# EAGLE board negativecircuit (EAGLE 6.4)
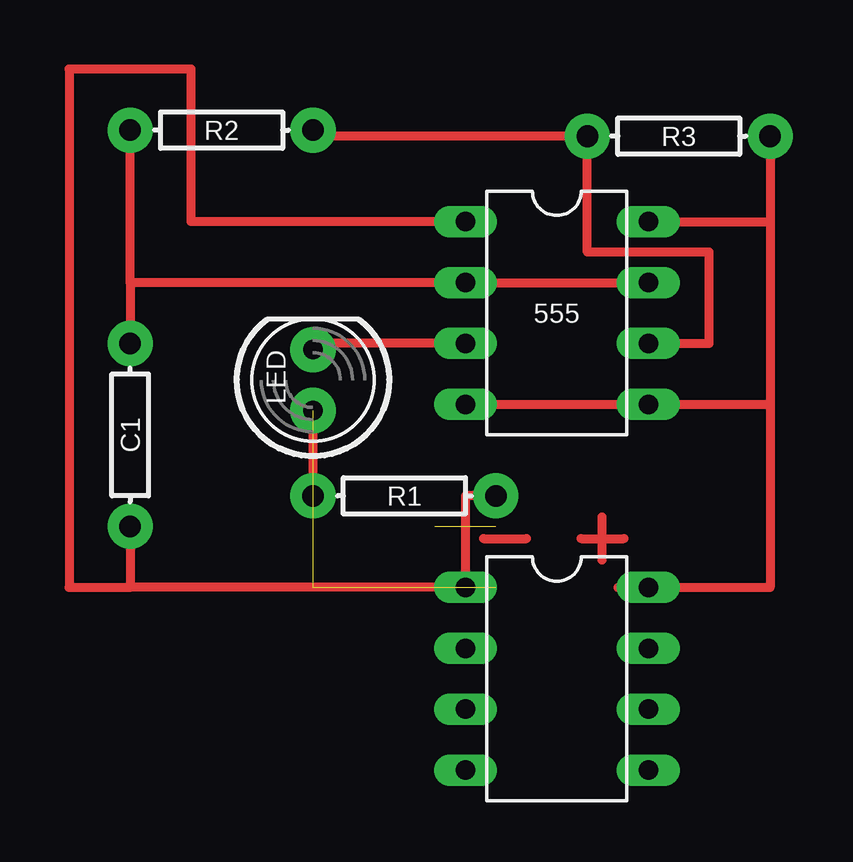
[diagram p0: board, top side]

No outline drawn. Coordinates in mm, seen from the top.
Copper layers (1*16): Top 0.035mm / dielectric 1.5mm / Bottom 0.035mm
Design rules "default": minimum track width 10mil, minimum drill 0.6mm, track to track 8mil, track to pad 8mil, pad to pad 8mil, via to via 8mil, smd to smd 8mil, copper to edge 40mil, drill to drill 8mil, minimum pad ring 10mil, minimum via ring 8mil, stop-mask expansion 4mil, vias tented up to drill 0mil, thermal gap 10mil

## Footprints (pad centres in the part's own frame; a part is rotated, then mirrored left to right if it is on the bottom)
DIL08 = drill 0.813 long: 1 -3.81,-3.81; 2 -1.27,-3.81; 3 1.27,-3.81; 4 3.81,-3.81; 5 3.81,3.81; 6 1.27,3.81; 7 -1.27,3.81; 8 -3.81,3.81
AXIAL-0.3EZ = drill 0.9 pad 1.88: P$1 -3.81,0; P$2 3.81,0
LED5MM = drill 0.813 pad 1.88: A -1.27,0; K 1.27,0

## Placement (x,y rotation side)
555  [DIL08]  33.02,36.83 270 top
C1  [AXIAL-0.3EZ]  15.24,31.75 270 top
E$5  [DIL08]  33.02,21.59 270 top
LED  [LED5MM]  22.86,34.04 90 top
R1  [AXIAL-0.3EZ]  26.67,29.21 0 top
R2  [AXIAL-0.3EZ]  19.05,44.45 180 top
R3  [AXIAL-0.3EZ]  38.1,44.2 0 top

## Library data of the parts
555 E$5 = adafruit
C1 R1-R3 = SparkFun-Passives
LED = SparkFun-LED

## Nets
S$2: 555.3 LED.K
S$4: 555.2 555.7
S$6: 555.6
S$8: 555.4 555.5 555.8
S$9: 555.1 LED.A R1.P$1 R1.P$2
S$10: R2.P$2

## Tracks (layer width: path | path; a pad name or v marks a point on that pad's centre or on a via)
S$1
  Top 0.381: 34.9,28.32 34.9,26.54
S$2
  Top 0.381: 555.3 22.86,35.56 LED.K
S$4
  Top 0.381: 555.7 555.2 15.24,38.1 | 15.24,38.1 15.24,35.56 | 15.24,38.1 15.24,39.37
S$5  (1 unrouted)
  Top 0.381: 29.97,27.43 31.75,27.43
S$6
  Top 0.381: 555.6 39.37,35.56 39.37,39.37 34.29,39.37 34.29,44.2 23.37,44.2
S$7
  Top 0.381: 34.04,27.43 35.81,27.43
S$8
  Top 0.381: 41.91,33.02 555.5 555.4 | 41.91,33.02 41.91,25.4 35.56,25.4 | 41.91,44.2 41.91,40.64 | 41.91,40.64 41.91,33.02 | 555.8 41.91,40.64
S$9  (3 unrouted)
  Top 0.381: 555.1 17.78,40.64 17.78,46.99 12.7,46.99 12.7,25.4 15.24,25.4 | 15.24,27.94 15.24,25.4 | 15.24,25.4 29.21,25.4 29.21,29.21 R1.P$2 | LED.A R1.P$1
S$10
  Top 0.381: 15.24,39.37 R2.P$2